# Altium PCB PCB1.PcbDoc
Units mm, origin at the board's own origin, x right, y up, seen from the top; angles counter-clockwise.
Board outline 70 x 50 mm, 2 copper layers (Top Layer, Bottom Layer), stack 1.071 mm thick; 28 components, 15 nets, 84 pads, 63 vias.
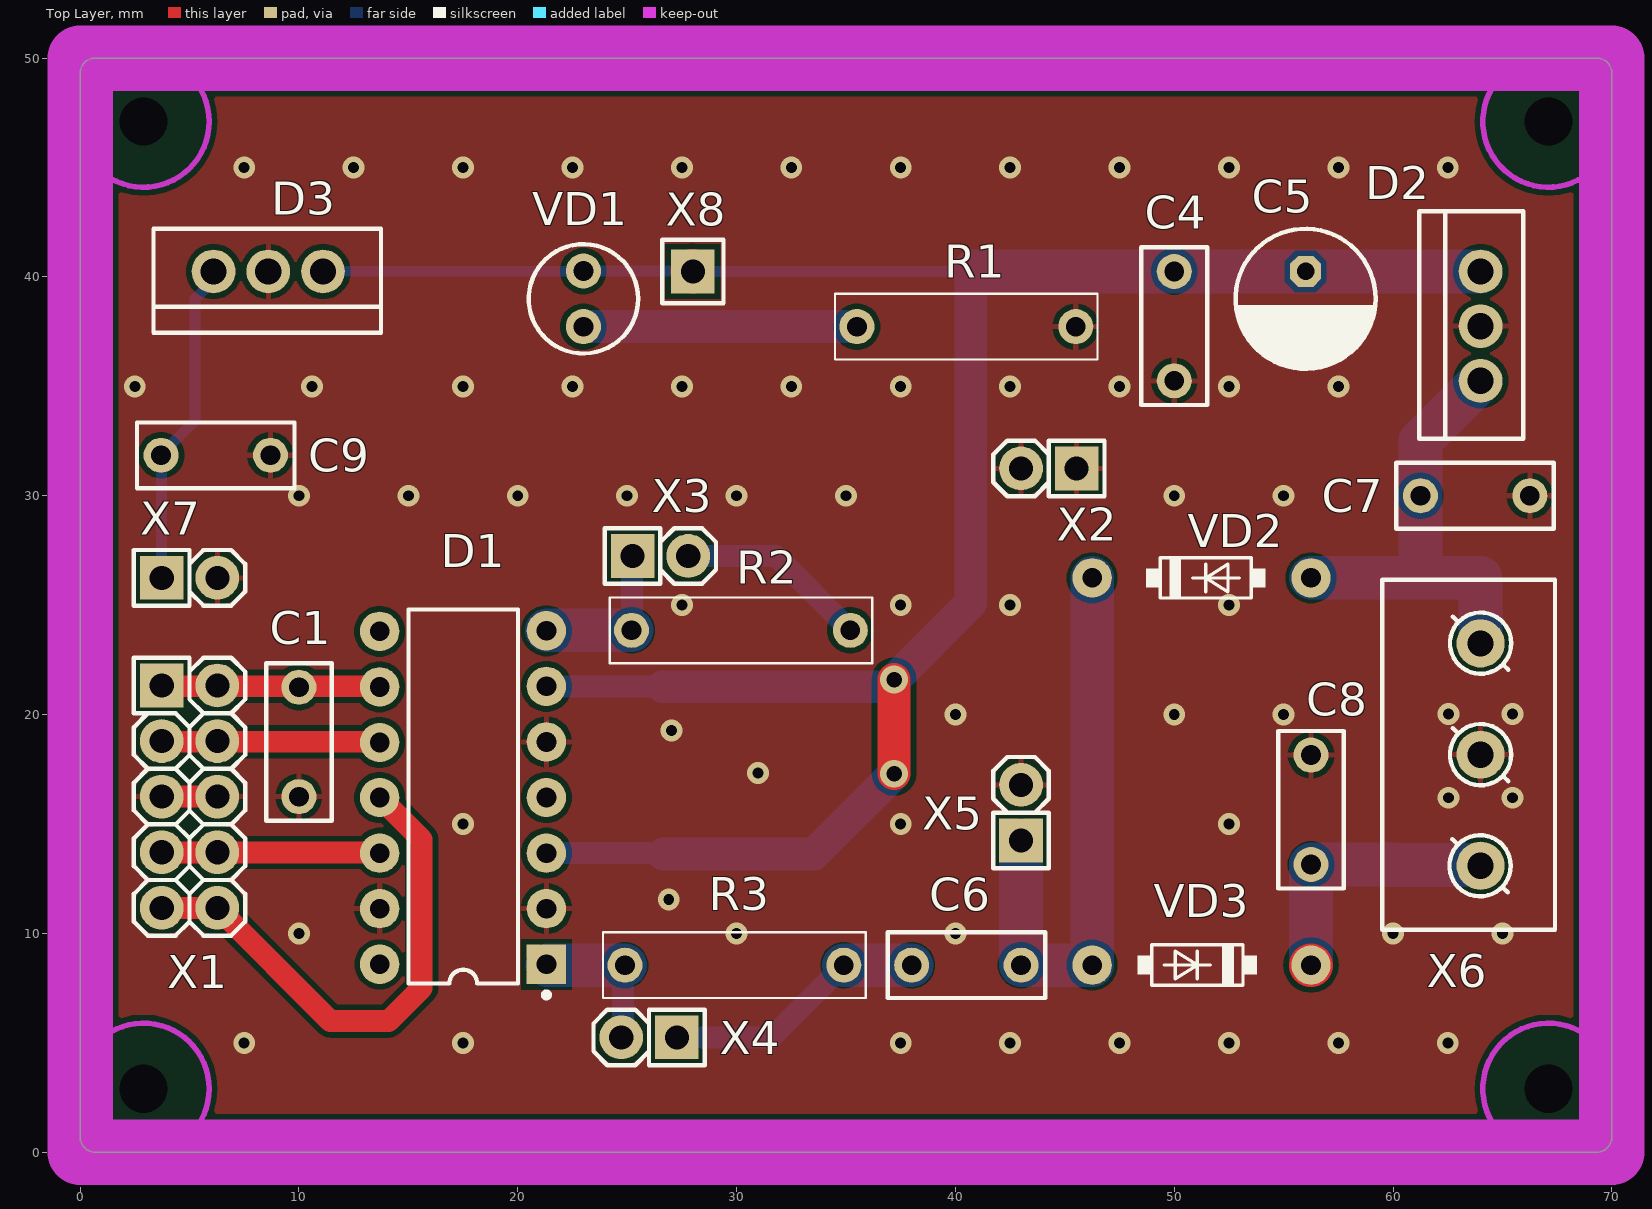
[diagram p0: Top Layer view]
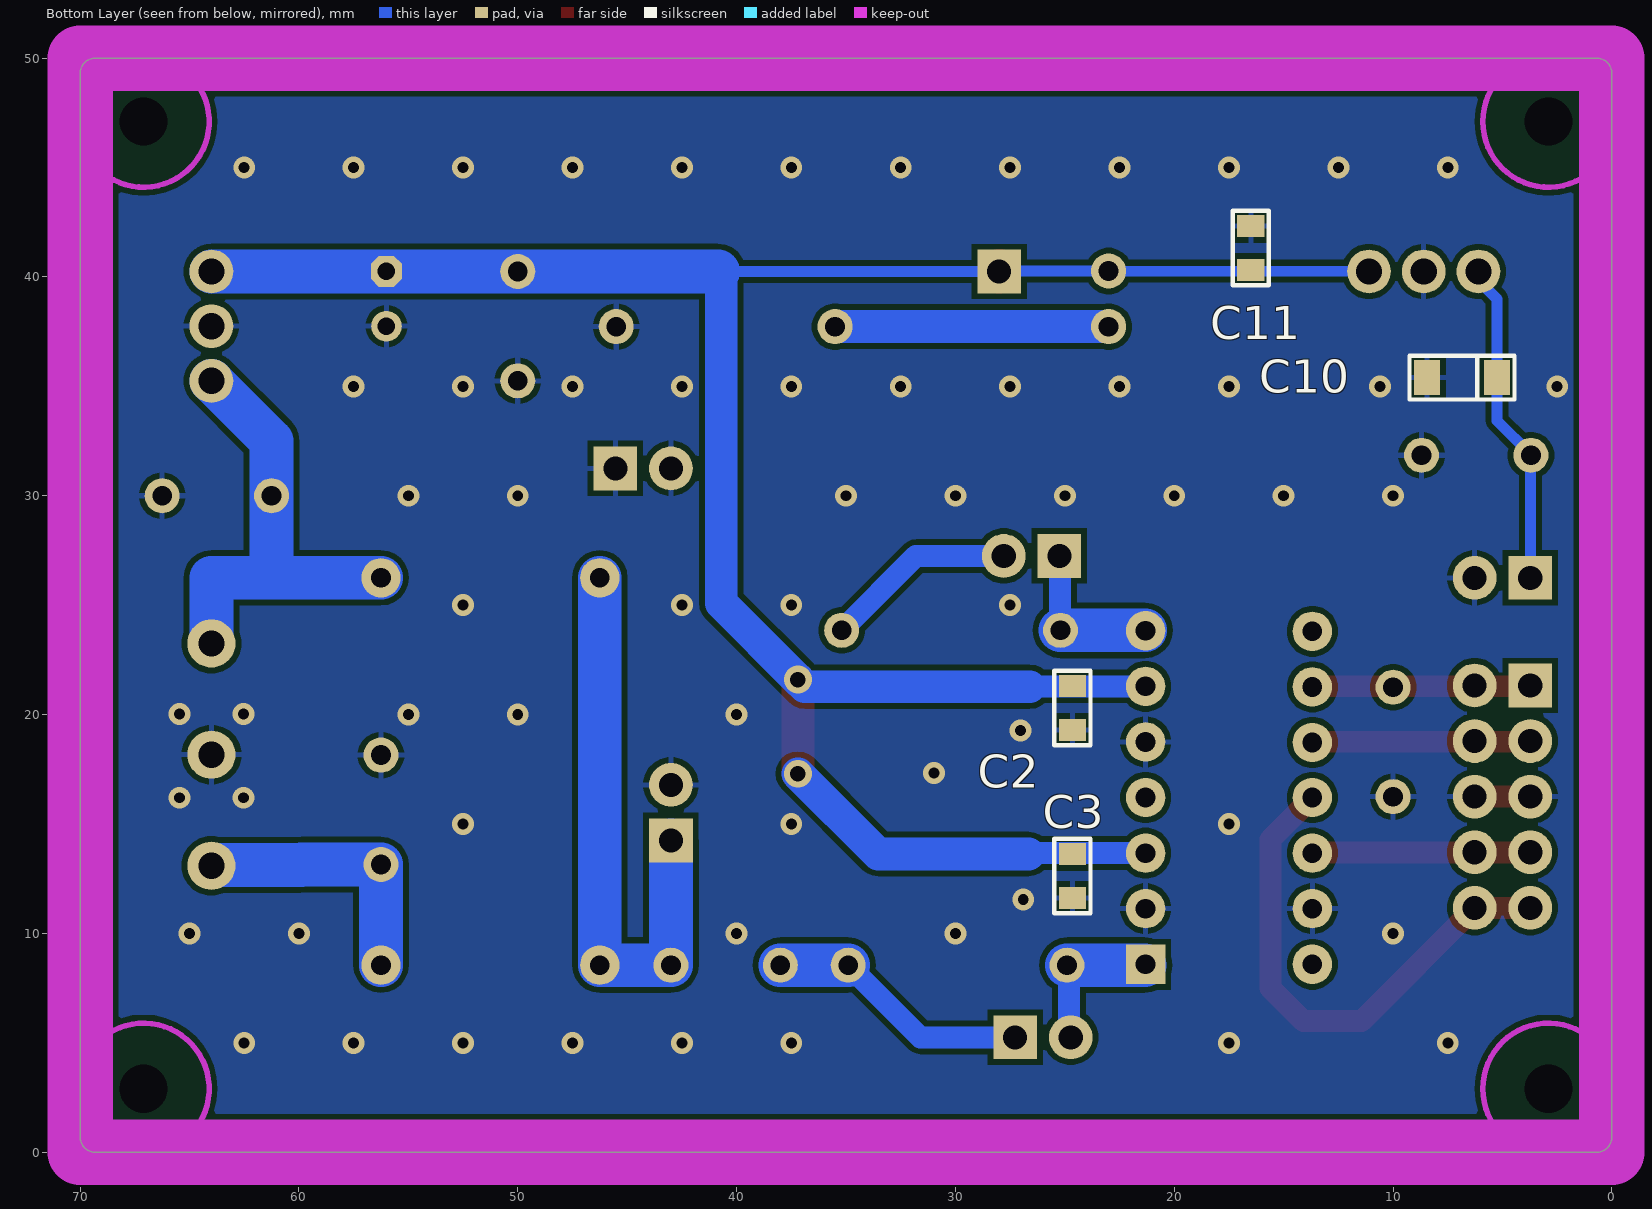
[diagram p1: Bottom Layer view, seen from below]
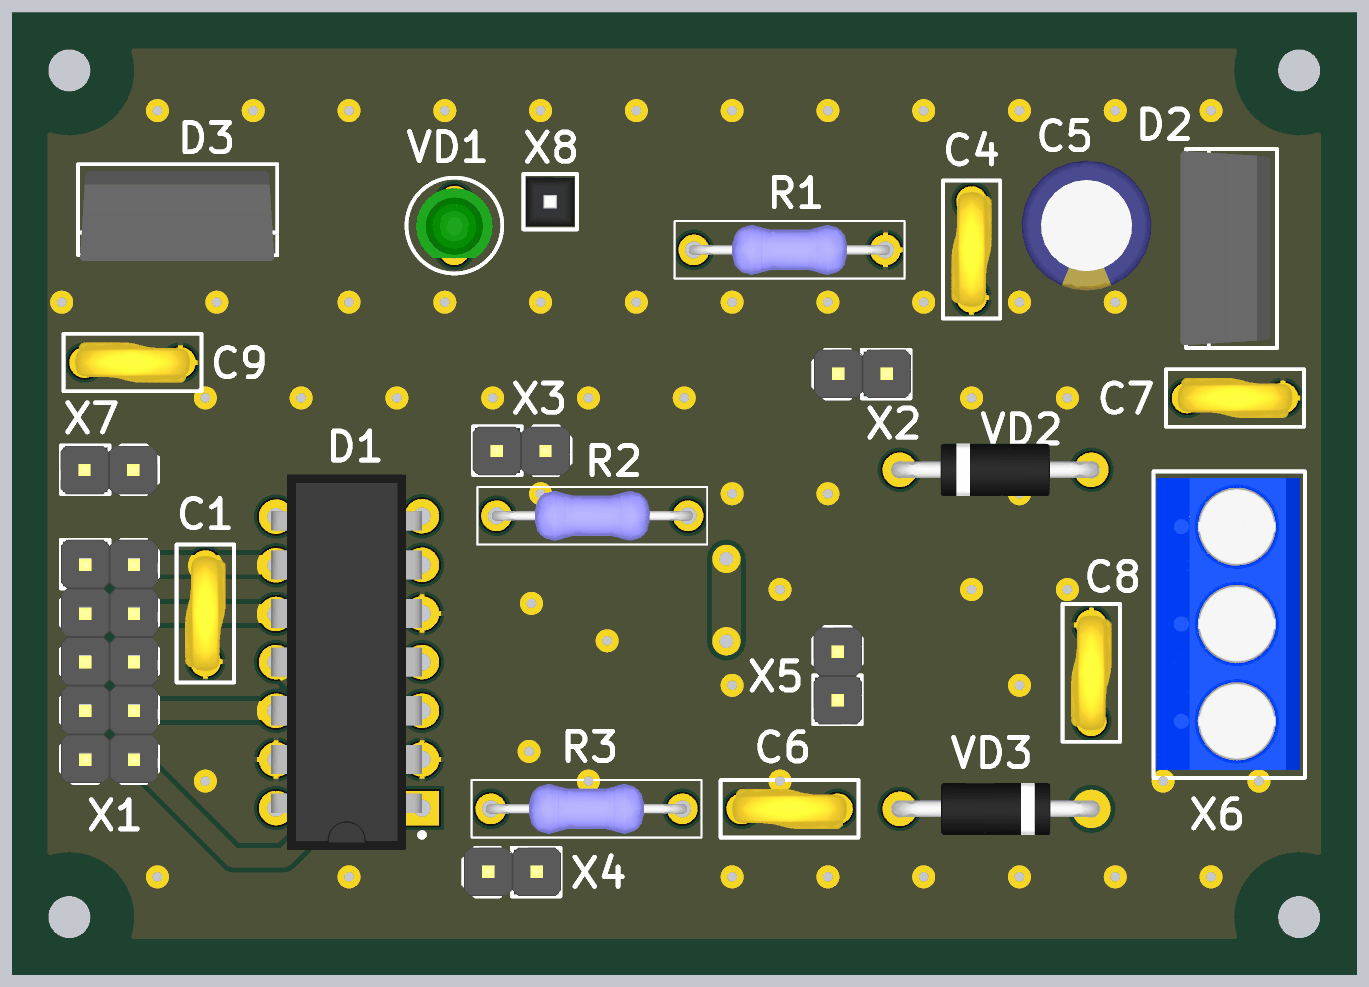
[diagram p2: 3D render of the assembled board from above, using the file's embedded part models]
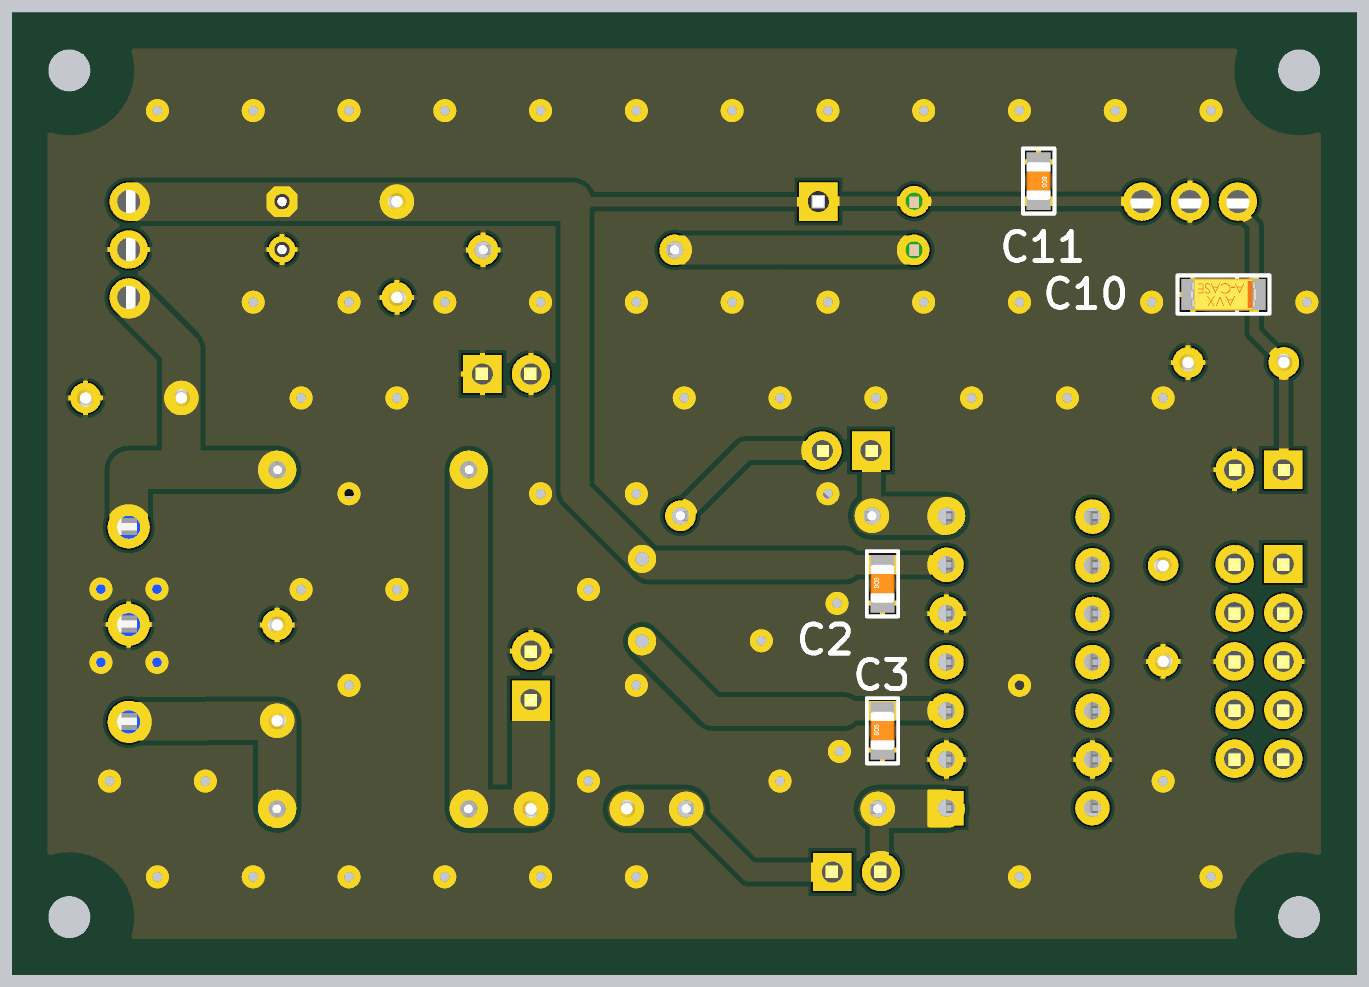
[diagram p3: 3D render of the assembled board from below, using the file's embedded part models]

## Layer stack, top to bottom
Top Solder: solder mask 0.0102, Solder Resist, Dk 3.5
Top Layer: signal copper 0.0356
Dielectric 1: dielectric 1, FR-4, Dk 4.8
Bottom Layer: signal copper 0.0356
Bottom Solder: solder mask 0.0102, Solder Resist, Dk 3.5

## Board outline
0,0.7 ccw(c0.7,0.7) 0.7,0 69.3,0 ccw(c69.3,0.7) 70,0.7 70,49.3 ccw(c69.3,49.3) 69.3,50 0.7,50 ccw(c0.7,49.3) 0,49.3

## Design rules (kind name [scope] priority, off if disabled: settings)
Clearance Clearance_1 [All] p1: gap=0.254 ignorepadtopadclearanceinfootprint=FALSE except(0: Arc-Hole Track-Hole SMDPad-Hole THPad-Hole Via-Hole Fill-Hole Poly-Hole Region-Hole Text-Hole)
PolygonConnect [All] p1: thpad.connectstyle=Relief thpad.reliefconductorwidth=0.254 thpad.reliefentries=4 thpad.polygonreliefangle="90 Angle" thpad.airgapwidth=0.254 smdpad.connectstyle=Relief smdpad.reliefconductorwidth=0.254 smdpad.reliefentries=4 smdpad.polygonreliefangle="90 Angle" smdpad.airgapwidth=0.254 via.connectstyle=Direct via.reliefconductorwidth=0.254 via.reliefentries=4 via.polygonreliefangle="90 Angle" via.airgapwidth=0.254
RoutingVias [All] p1: holewidth=0.5 width=0.635 viastyle="Through Hole" minholewidth=0.4 minwidth=0.635 maxholewidth=1 maxwidth=1.27 viatemplateguid#1={B1F21D09-C755-42A3-8A41-1B4ACBDF1881} viatemplatename#1=v64h33
SilkToSolderMaskClearance [IsText] p1: minsilkscreentomaskgap=0.254 clearancetoexposedcopper=TRUE
SolderMaskExpansion [All] p1: expansion=0.102 istentingtop=FALSE
Width Width_POWER [InNetClass('Net Class Power')] p1: maxlimit=2 minlimit=0.254 preferedwidth=2
Width Width_1 [All] p2: maxlimit=2 minlimit=0.254 preferedwidth=0.254
29 further rules are at their usual default settings.

## Classes and differential pairs
net class mounting_hole: 24V
net class "Net Class Power": 12V 24V 36VO GND NetC6_1 NetC6_2 NetD1_1 NetD1_7

## Components (designator, comment, footprint, x,y, rotation, side; value= is the part's Value field where it differs from the comment)
C1 "" "CAP: HOLE 5mm" 10,16.25 r90 top value=1μF
C2 "Ceramic capacitor, 0.1μF, X7R, ±10%, , 0805, -55...+125°C" "CAP: 0805" 24.65,20.3 r90 bottom value=0.1μF
C3 "Ceramic capacitor, 0.1μF, X7R, ±10%, , 0805, -55...+125°C" "CAP: 0805" 24.65,12.625 r90 bottom value=0.1μF
C4 "" "CAP: HOLE 5mm" 50,35.25 r90 top value=0.1μF
C5 "Aluminium capacitor, 330μF, 25V, ±20%, 54mOhm, 14x10x5 mm, -55...+105°C" "CAP: D6.3C2.5H11" 56,39 r270 top value=330μF
C6 "" "CAP: HOLE 5mm" 43,8.55 r180 top value=0.1μF
C7 "" "CAP: HOLE 5mm" 66.25,30 r180 top value=1μF
C8 "" "CAP: HOLE 5mm" 56.25,18.15 r270 top value=1μF
C9 "" "CAP: HOLE 5mm" 8.7,31.85 r180 top value=0.1μF
C10 "Tantalum capacitor, 4.7μF, 16V, ±10%, 2Ohm, case A (3216), -55...+125°C" "CAP: TANTAL-A" 6.85,35.4 r0 bottom value=4.7μF
C11 "Ceramic capacitor, 0.1μF, X7R, ±10%, , 0805, -55...+125°C" "CAP: 0805" 16.5,41.325 r270 bottom value=0.1μF
D1 "Infineon Technologies" 14-DIP 17.5,16 r180 top
D2 "" TO-220F 64,37.75 r90 top
D3 "" TO-220F 8.6,40.25 r180 top
R1 "" "RES: Axial 10mm" 45.5,37.73 r180 top value=2k
R2 "" "RES: Axial 10mm" 25.2,23.85 r0 top value=12
R3 "" "RES: Axial 10mm" 24.9,8.55 r0 top value=12
VD1 "LED, Green, *, *, *, -55...+150°C" "LED: Axial 3MM" 23,39 r270 top
VD2 "=TypeDiode+', '+Voltage+', '+Current+', '+VoltageDrop+', '+RecoveryTime+', '+Package+', '+Temperature" "DIODE: DO41" 51.25,26.25 r180 top
VD3 "=TypeDiode+', '+Voltage+', '+Current+', '+VoltageDrop+', '+RecoveryTime+', '+Package+', '+Temperature" "DIODE: DO41" 51.25,8.55 r0 top
X1 "Connector, 10pin, 2.54mm, 500VAC, 3A" "CON: PLD-10" 5,16.25 r270 top
X2 "Connector, 2pin, 2.54mm, 500VAC, 3A" "CON: PLS-2" 44.27,31.25 r180 top
X3 "Connector, 2pin, 2.54mm, 500VAC, 3A" "CON: PLS-2" 26.52,27.25 r0 top
X4 "Connector, 2pin, 2.54mm, 500VAC, 3A" "CON: PLS-2" 26,5.25 r180 top
X5 "Connector, 2pin, 2.54mm, 500VAC, 3A" "CON: PLS-2" 43,15.52 r90 top
X6 "" "CON: Terminal 3p 5mm" 64,18.17 r90 top
X7 "Connector, 2pin, 2.54mm, 500VAC, 3A" "CON: PLS-2" 5,26.25 r0 top
X8 "Connector, 1pin, 2.54mm, 500VAC, 3A" "CON: PLS-1" 28,40.3 r0 top

## Footprints (in the part's own frame and the unit in brackets; to place one, negate y for a bottom-side part, rotate by r counter-clockwise, add the part's x,y. Pads: shape width x height; smd on the part's side, far side on the other; paste and mask are expansions set on the pad)
14-DIP [mm]
  rect 1.8x1.8 hole 0.9: 1(-3.81,7.41)
  round 0.7 on Mech1: 1(-3.23,7.83)
  round 1.8 hole 0.9: 2(-3.81,4.87) 3(-3.81,2.33) 4(-3.81,-0.21) 5(-3.81,-2.75) 6(-3.81,-5.29) 7(-3.81,-7.83) 8(3.81,-7.805) 9(3.81,-5.265) 10(3.81,-2.725) 11(3.81,-0.21) 12(3.81,2.33) 13(3.81,4.87) 14(3.81,7.41)
  silkscreen extent -3.94,-8.8 2.49,8.93, body extent -3.81,-10.01 4.06,9.59, height 4.36
"CAP: 0805" [mm]
  rect 1x1.25 smd: 1(-1,0) 2(1,0)
  silkscreen extent -1.7,-0.82 1.7,0.82, body extent -1,-0.62 1,0.63, height 0.78
"CAP: D6.3C2.5H11" [mm]
  oct 1.4x1.4 hole 0.8: 1(-1.25,0)
  round 1.4 hole 0.8: 2(1.25,0)
  silkscreen extent -3.2,-3.2 3.2,3.2, body extent -3.4,-3.4 3.4,3.4, height 12.5
"CAP: HOLE 5mm" [mm]
  round 1.6 hole 0.9: 1(0,0) 2(5,0)
  silkscreen extent -1.1,-1.5 6.1,1.5, body extent -0.5,-1.05 5.5,1.05, height 8.1
"CAP: TANTAL-A" [mm]
  rect 1.2x1.6 smd: 1(-1.6,0) 2(1.6,0)
  silkscreen extent -2.4,-1 2.4,1, body extent -1.7,-0.84 1.7,0.84, height 1.71
"CON: PLD-10" [mm]
  rect 2x2 hole 1.1: 1(-5.08,-1.27)
  round 2 hole 1.1: 2(-5.08,1.27) 3(-2.54,-1.27) 4(-2.54,1.27) 5(0,-1.27) 6(0,1.27) 7(2.54,-1.27) 8(2.54,1.27) 9(5.08,-1.27) 10(5.08,1.27)
  silkscreen extent -6.35,-2.54 6.35,2.54, body extent -6.35,-2.54 6.35,2.54, height 8.54
"CON: PLS-1" [mm]
  rect 2x2 hole 1.1: 1(0,-0.05)
  silkscreen extent -1.4,-1.5 1.4,1.4, body extent -1.27,-1.32 1.27,1.22, height 8.54
"CON: PLS-2" [mm]
  rect 2x2 hole 1.1: 1(-1.27,0)
  round 2 hole 1.1: 2(1.27,0)
  silkscreen extent -2.54,-1.27 2.54,1.27, body extent -2.57,-1.28 2.51,1.26, height 8.54
"CON: Terminal 3p 5mm" [mm]
  round 2.2 hole 1.2: 1(-5.08,0) 2(0,0) 3(5.08,0)
  round 0.5 on Top Overlay: ""(-5.75,-2.75)
  silkscreen extent -8,-3.4 8,4.5, body extent -7.59,-3.15 7.65,4.35, height 10
"DIODE: DO41" [mm]
  round 1.8 hole 0.9: 1(-5,0) 2(5,0)
  silkscreen extent -2.91,-0.91 2.52,0.96, body extent -5.41,-1.36 5.45,1.36, height 4.36
"LED: Axial 3MM" [mm]
  round 1.6 hole 0.9: 1(-1.27,0) 2(1.27,0)
  silkscreen extent -2.5,-2.5 2.5,2.5, body extent -1.97,-2 1.7,2, height 7.6
"RES: Axial 10mm" [mm]
  round 1.6 hole 0.9: 1(0,0) 2(10,0)
  silkscreen extent -1,-1.5 11,1.5, body extent -0.25,-1.3 10.25,1.3, height 2.17
TO-220F [mm]
  round 2 hole 1.2: 1(-2.5,0) 2(0,0) 3(2.5,0)
  silkscreen extent -5.15,-1.95 5.25,2.8, body extent -5,-1.6 5.14,3.1, height 19.57

## Part data
C1 C4 C6 C7 C8 C9: library part Ceramic, TypeCapacitor="Ceramic capacitor"
C2 C3 C11: library part Ceramic_0805, Manufacturer=Yageo, Package=0805, PartNumber=CC0805KRX7R7BB104, Temperature=-55...+125°C, Tolerance=±10%, TypeCapacitor="Ceramic capacitor", TypeDielectric=X7R, HelpURL=https://www.digikey.com/product-detail/en/yageo/CC0805KRX7R7BB104/311-1142-1-ND/303052, ValueManufacturerPartNumber="Ceramic capacitor, 0.1μF, X7R, ±10%, , 0805, -55...+125°C"
C5: library part Aluminium, Manufacturer=Wurth, Package="14x10x5 mm", PartNumber=860080475013, Temperature=-55...+105°C, Tolerance=±20%, TypeCapacitor="Aluminium capacitor", Voltage=25V, HelpURL=https://www.digikey.com/product-detail/en/wurth-electronics-inc/860080475013/732-9029-1-ND/5728972, Impedance=54mOhm, ValueManufacturerPartNumber="Aluminium capacitor, 330μF, 25V, ±20%, 54mOhm, 14x10x5 mm, -55...+105°C"
C10: library part Tantal_A, Manufacturer=AVX, Package="case A (3216)", PartNumber=F930J107KAAAJ6, Temperature=-55...+125°C, Tolerance=±10%, TypeCapacitor="Tantalum capacitor", TypeDielectric=X7R, Voltage=16V, HelpURL=https://www.digikey.com/product-detail/en/avx-corporation/F930J107KAAAJ6/478-12404-1-ND/9645231, Impedance=2Ohm, ValueManufacturerPartNumber="Tantalum capacitor, 4.7μF, 16V, ±10%, 2Ohm, case A (3216), -55...+125°C"
D1: library part IR2110PBF, "Gate driver", Package=DIP-14, ComponentType="Gate driver", HelpURL=https://www.digikey.com/product-detail/en/infineon-technologies/IR2110PBF/IR2110PBF-ND/811566, Manufacturer="Infineon Technologies", PartNumber=IR2110PBF
D2: library part 78XX, "Linear voltage regulator", PartNumber=7812, ComponentType="Linear voltage regulator"
D3: library part 78XX, "Linear voltage regulator", PartNumber=7805, ComponentType="Linear voltage regulator"
R1 R2 R3: library part Resistor_Axial, Tolerance=±5%
VD1: library part LED_single, Color=GREEN, ColorParameter=Green, Temperature=-55...+150°C, TypeDiode=LED, ValueManufacturerPartNumber="LED, Green, *, *, *, -55...+150°C"
VD2 VD3: library part Diode_single, Current=1A, Manufacturer=STMicroelectronics, Package=DO-41, PartNumber=1N5819, Temperature="150°C (Max)", ValueManufacturerPartNumber=#NAME?, Voltage=40V, VoltageDrop=550mV, HelpURL=https://www.digikey.com/product-detail/en/stmicroelectronics/1N5819/497-6610-1-ND/1865421, RecoveryTime="=< 500ns", TypeDiode="Single diode"
X1: library part PLD-10, CurrentMax=3A, Manufacturer=Connfly, VoltageMax=500VAC, HelpURL=https://www.chipdip.ru/product/pld-10, Multichannel=10pin, PartNumber=PLD-10, Pitch=2.54mm, TypeConnector=Connector, ValueManufacturerPartNumber="Connector, 10pin, 2.54mm, 500VAC, 3A"
X2 X3 X4 X5 X7: library part PLS-2, CurrentMax=3A, Manufacturer=Connfly, VoltageMax=500VAC, HelpURL=https://www.chipdip.ru/product/pls-2, Multichannel=2pin, PartNumber=PLS-2, Pitch=2.54mm, TypeConnector=Connector, ValueManufacturerPartNumber="Connector, 2pin, 2.54mm, 500VAC, 3A"
  X2 X3 X4 X5: CommentText="\"Разъем\""
X6: library part "Terminal block 3", CommentText="\"Разъем\"", Multichannel=3pin, TypeConnector=Connector
X8: library part PLS-1, CurrentMax=3A, Manufacturer=Connfly, VoltageMax=500VAC, CommentText="\"Разъем\"", HelpURL=https://www.chipdip.ru/product/pls-2, Multichannel=1pin, PartNumber=PLS-1, Pitch=2.54mm, TypeConnector=Connector, ValueManufacturerPartNumber="Connector, 1pin, 2.54mm, 500VAC, 3A"

## Free pads (board coordinates)
  round 1.524 hole 2.2 unplated: 5(2.9,2.9) 5(2.9,47.1) 5(67.1,47.1) 5(67.1,2.9)

## Via types
v1: diameter 1, hole 0.5, Top Layer to Bottom Layer, 61 vias
v2: diameter 1.27, hole 0.711, Top Layer to Bottom Layer, 2 vias

## Nets (pads, with @x,y where several pads share a name; then routed paths per layer and width w, separated by ;. In a path a pad name is that pad's centre, name@x,y a point inside that pad or via, vN(x,y) a via of type N, cw(c..) or ccw(c..) an arc to the next point about the centre after c; other vN are vias at no path point)
3.3V: C1.2 D1.9 X1.1 X1.2 | length 10.1
  Top Layer w1: X1.1 3.762,21.298 13.657,21.298 D1.9
  Bottom Layer w0.254: X1.2 X1.2@6.31,21.29 ; C1.2@9.96,21.29 C1.2 C1.2@10.008,21.258 ; D1.9@13.682,21.258 D1.9
5V: C9.2 C10.1 D3.3 X7.1 | length 15
  Bottom Layer w0.5: X7.1 3.715,26.265 3.715,31.835 C9.2 3.7,31.877 5.25,33.427 C10.1 5.25,38.994 6.1,39.844 D3.3
12V: C2.2 C3.2 C4.2 C5.1 C11.2 D1.3 D1.6 D2.3 D3.1 VD1.1 X8.1 | length 110.6
  Top Layer w1.5: v2(37.2,17.3) v2(37.2,21.6)
  Top Layer w2: X8.1@27.98,40.27 X8.1
  Bottom Layer w0.5: D3.1@11.11,40.26 VD1.1@22.99,40.26 ; VD1.1 X8.1@27.98,40.27 ; X8.1 40.85,40.25
  Bottom Layer w1: D1.3 26.615,13.67 26.655,13.63 ; D1.6 26.585,21.29 26.6,21.275
  Bottom Layer w1.5: D3.1 D3.1@11.11,40.26 ; VD1.1@22.99,40.26 VD1.1 ; 26.6,21.275 36.875,21.275 v2(37.2,21.6) 40.7,25.1 40.7,40.1 ; 26.655,13.63 33.53,13.63 v2(37.2,17.3)
  Bottom Layer w2: 40.85,40.25 C4.2 C5.1 D2.3
24V: C7.2 D2.1 VD2.1 X6.3 | length 20.9
  Bottom Layer w2: VD2.1 61.25,26.25 ; X6.3 64,26.25 61.25,26.25 ; D2.1 61.25,32.5 C7.2 61.25,26.25
36VO: C8.2 VD3.2 X6.1 | length 12.9
  Top Layer w0.254: X6.1@63.473,13.09 X6.1
  Top Layer w2: X6.1@63.962,13.128 X6.1
  Bottom Layer w2: VD3.2 C8.2 59.886,13.15 ; 59.908,13.128 X6.1@63.962,13.128
GND: C1.1 C2.1 C3.1 C4.1 C5.2 C7.1 C8.1 C9.1 C10.2 C11.1 D1.2 D1.5 D1.13 D2.2 D3.2 R1.1 X1.5 X1.6 X2.1 X2.2 X5.2 X6.2 X7.2 | length 2.5
  Top Layer w1: X1.5 X1.6
  other v1: 7.5,5 17.5,5 37.5,5 42.5,5 47.5,5 52.5,5 57.5,5 62.5,5 10,10 30,10 40,10 60,10 65,10 26.9,11.55 17.5,15 37.5,15 52.5,15 62.525,16.2 65.45,16.2 30.975,17.325 27.025,19.275 40,20 50,20 55,20 62.525,20.025 65.45,20.025 27.5,25 37.5,25 42.5,25 52.5,25 10,30 15,30 20,30 25,30 30,30 35,30 50,30 55,30 2.5,35 10.6,35 17.5,35 22.5,35 27.5,35 32.5,35 37.5,35 42.5,35 47.5,35 52.5,35 57.5,35 7.5,45 12.5,45 17.5,45 22.5,45 27.5,45 32.5,45 37.5,45 42.5,45 47.5,45 52.5,45 57.5,45 62.5,45
HIN: D1.10 X1.3 X1.4 | length 10.1
  Top Layer w1: X1.3 3.762,18.758 13.657,18.758 D1.10
  Bottom Layer w0.254: X1.4 X1.4@6.302,18.758 ; D1.10@13.657,18.758 D1.10
HO: R2.2 X3.2 | length 8.8
  Bottom Layer w1: X3.2 31.8,27.25 R2.2
LIN: D1.12 X1.7 X1.8 | length 10
  Top Layer w1: X1.7 3.75,13.69 13.67,13.69 D1.12
  Bottom Layer w0.254: X1.8 X1.8@6.29,13.69 ; D1.12@13.67,13.69 D1.12
NetC6_1: C6.1 VD2.2 VD3.1 X5.1 | length 26.8
  Top Layer w0.254: VD2.2@46.375,26.125 VD2.2@46.5,26.25
  Bottom Layer w2: X5.1 C6.1 VD3.1 VD2.2
NetC6_2: C6.2 R3.2 X4.1 | length 12.1
  Bottom Layer w1: X4.1 31.6,5.25 R3.2
  Bottom Layer w2: R3.2 C6.2
NetD1_1: D1.1@21.31,8.59 R3.1 X4.2 | length 7.2
  Top Layer w0.254: X4.2 X4.2@24.815,5.335 ; R3.1@24.815,8.465 R3.1
  Bottom Layer w0.254: D1.1@21.31,8.59 D1.1@21.35,8.55
  Bottom Layer w1: X4.2 24.815,5.335 24.815,8.465 R3.1
  Bottom Layer w2: D1.1@21.35,8.55 R3.1
NetD1_7: D1.7 R2.1 X3.1 | length 7.4
  Top Layer w0.254: X3.1@25.2,27.2 X3.1
  Bottom Layer w1: R2.1 25.225,23.875 25.225,27.225 X3.1
  Bottom Layer w2: D1.7@21.33,23.85 R2.1
NetR1_2: R1.2 VD1.2 | length 12.5
  Bottom Layer w1.5: VD1.2 R1.2
SD: D1.11 X1.9 X1.10 | length 24.1
  Top Layer w1: X1.9 X1.10 11.44,6 14.1,6 15.6,7.5 15.6,14.3 D1.11
pads on no net: D1.1@20.73,8.17 D1.4 D1.8 D1.14 X6.

## Polygon pours and split planes (outlines as drawn)
GND on Bottom Layer "GND_L02_P003" (solid, remove dead copper, pour order 3): 0,50 0.1,50.1 69.8,50.1 69.8,0.3 69.5,0 0,0
GND on Top Layer "GND_L01_P002" (solid, remove dead copper, pour order 2): 69.8,49.9 69.8,0.2 70,0 0,0 0,50

## Keep-outs
Keep-Out Layer:
  circle w0.254: c2.9,2.9 r3
  circle w0.254: c2.9,47.1 r3
  circle w0.254: c67.1,47.1 r3
  circle w0.254: c67.1,2.9 r3
  lines w3: 0,0 70,0 70,50 0,50 0,0

## Silkscreen, mask and mechanical layers (free items; w line width, h text height)
Board Shape:
  the board outline again, w0.254